# EAGLE board kai (EAGLE 9.6.2)
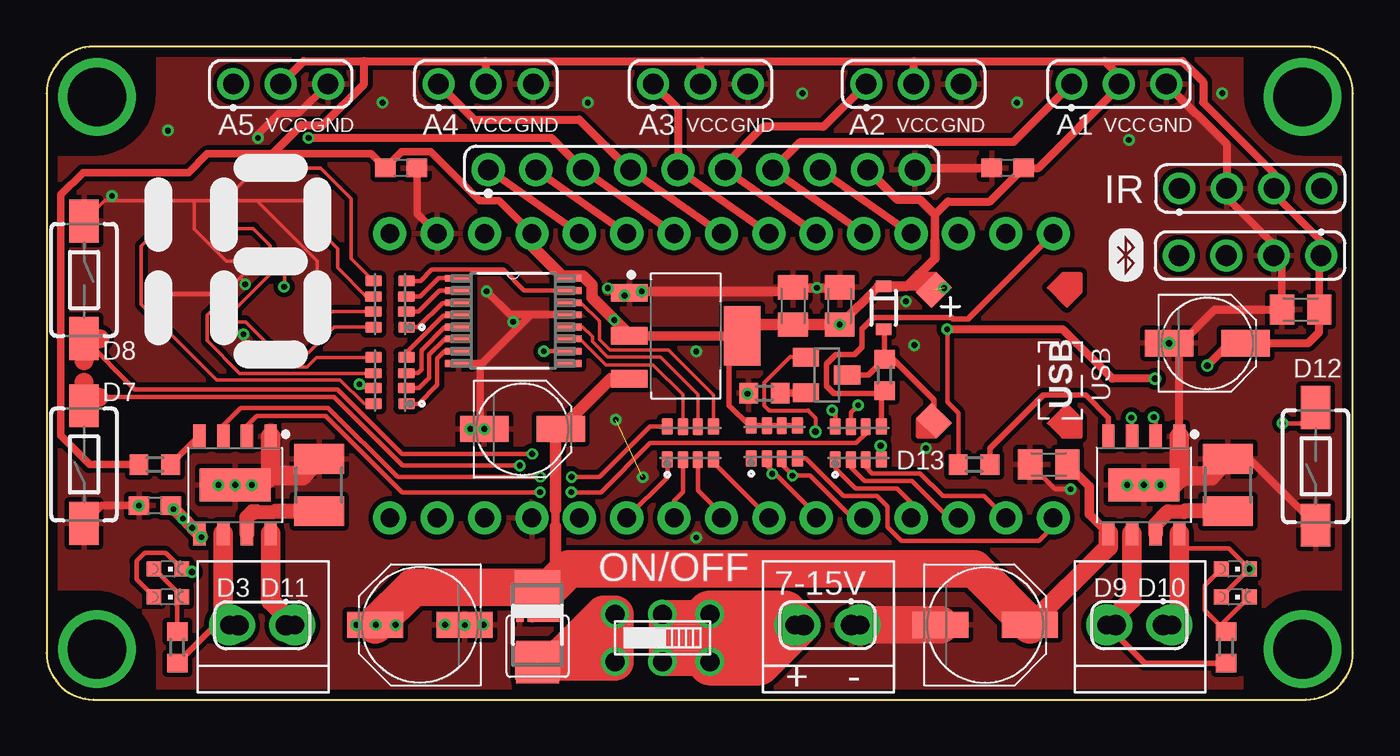
[diagram p0: board, top side]
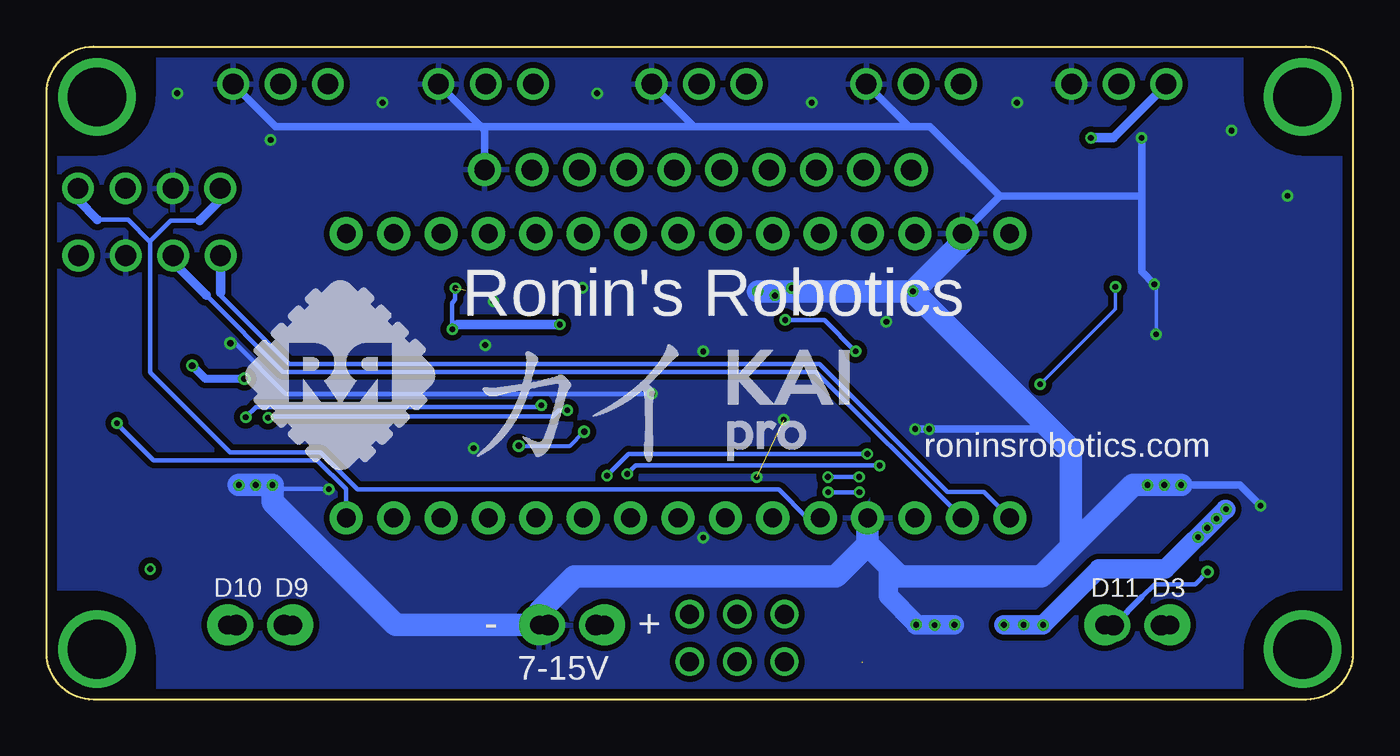
[diagram p1: board, bottom side, seen from below]

Size 70 x 35 mm. Coordinates in mm from the lower left corner, seen from the top.
Outline: 0,2.5 arc90 2.5,0 67.5,0 arc90 70,2.5 70,32.5 arc90 67.5,35 2.5,35 arc90 0,32.5 0,2.5
Copper layers (1*16): Top 0.035mm / dielectric 1.6mm / Bottom 0.035mm
Design rules "Elecrow_2-layer_PCB_eagle_rule *": minimum track width 6mil, minimum drill 12mil, track to track 6mil, track to pad 6mil, pad to pad 6mil, via to via 8mil, smd to smd 0mil, copper to edge 20mil, drill to drill 10mil, minimum pad ring 6mil, minimum via ring 6mil, stop-mask expansion 0mil, vias tented up to drill 100mil, thermal gap 10mil

## Footprints (pad centres in the part's own frame; a part is rotated, then mirrored left to right if it is on the bottom)
C0805K = smd 1.3 x 1.6: 1 -1,0; 2 1,0
C0603 = smd 1.1 x 1: 1 -0.85,0; 2 0.85,0
PANASONIC_C = smd 2.6 x 1.4: + 2.05,0; - -2.05,0
SOD-323 = smd 0.63 x 0.83: A 1.15,0; C -1.15,0
1X10 = drill 1.092 pad 1.778: 1 -11.43,0; 2 -8.89,0; 3 -6.35,0; 4 -3.81,0; 5 -1.27,0; 6 1.27,0; 7 3.81,0; 8 6.35,0; 9 8.89,0; 10 11.43,0
DFN-8_3X3 = smd 2.29 x 2.29: D 0,0.8 | smd 0.4 x 0.7: G 0.96,-1.7 | smd 1.7 x 0.7: S -0.3,-1.7
RESCAXS80P320X160X70-8N = smd 0.61 x 0.9: 1 -1.24,-0.885; 4 1.24,-0.885; 5 1.24,0.885; 8 -1.24,0.885 | smd 0.53 x 0.9: 2 -0.4,-0.885; 3 0.4,-0.885; 6 0.4,0.885; 7 -0.4,0.885
SOT23-BEC = smd 1 x 1.4: B -0.95,-1.1; C 0,1.1; E 0.95,-1.1
SOP65P640X120-16N = smd 1.473 x 0.356: 1 -2.921,2.286; 2 -2.921,1.626; 3 -2.921,0.965; 4 -2.921,0.33; 5 -2.921,-0.33; 6 -2.921,-0.965; 7 -2.921,-1.626; 8 -2.921,-2.286; 9 2.921,-2.286; 10 2.921,-1.626; 11 2.921,-0.965; 12 2.921,-0.33; 13 2.921,0.33; 14 2.921,0.965; 15 2.921,1.626; 16 2.921,2.286
ARDUINO_NANO = drill 1 pad 1.778: 3V3 7.874,2.794; A0 7.874,7.874; A1 7.874,10.414; A2 7.874,12.954; A3 7.874,15.494; A4 7.874,18.034; A5 7.874,20.574; A6 7.874,23.114; A7 7.874,25.654; D2 -7.366,25.654; D3 -7.366,23.114; D4 -7.366,20.574; D5 -7.366,18.034; D6 -7.366,15.494; D7 -7.366,12.954; D8 -7.366,10.414; D9 -7.366,7.874; D10 -7.366,5.334; D11 -7.366,2.794; D12 -7.366,0.254; D13 7.874,0.254; GND -7.366,28.194; GND1 7.874,33.274; REF 7.874,5.334; RST -7.366,30.734; RST1 7.874,30.734; RX0 -7.366,33.274; TX1 -7.366,35.814; VA 7.874,35.814; VCCA 7.874,28.194
SOT230P700X170-4 = smd 1.965 x 0.932: 1 -3.023,2.3; 2 -3.023,0; 3 -3.023,-2.3 | smd 1.965 x 3.189: 4 3.023,0
SOIC127P600X170-8 = smd 1.27 x 0.66: 1 -2.607,1.905; 2 -2.607,0.635; 3 -2.607,-0.635; 4 -2.607,-1.905; 5 2.607,-1.905; 6 2.607,-0.635; 7 2.607,0.635; 8 2.607,1.905 | smd 1.778 x 3.81: P$1 0,0
C&K_HEX_DIP_SLIDE = drill 1.016: 1 -2.54,-1.27; 2 0,-1.27; 3 2.54,-1.27; 4 -2.54,1.27; 5 0,1.27; 6 2.54,1.27
DO-214AC = smd 1.8 x 2.4: A 2.025,0; C -2.025,0
PANASONIC_D = smd 3 x 1.4: + 2.4,0; - -2.4,0
R0603 = smd 1 x 1.1: 1 -0.85,0; 2 0.85,0
SMD_7.5_BUZZER = smd 1.55 x 1.2 rotated 45: + -3.5,3.5 | smd 1.55 x 1.2 rotated 135: - -3.5,-3.5
1X2 = drill 1.092 pad 1.778: P$1 0,0; P$2 2.54,0
R1210 = smd 1.6 x 2.7: 1 -1.4,0; 2 1.4,0
0603_LED_GREEN = smd 0.8 x 0.8: A 0,-0.75; C 0,0.75
HDRVR4W64P254_1X4_1016X240X800B = drill 1.105 pad 1.705: 1 0,0; 2 2.54,0; 3 5.08,0; 4 7.62,0
1X2-3.5MM = drill 1 pad 2.184: 1 1.8,0; 2 -1.7,0
TACTILE_SWITCH_SMD_6.0X3.5MM = smd 2.3 x 1.6: 1 -3.15,0; 2 3.15,0
HDRVR3W64P254_1X3_762X240X800B = drill 1.105 pad 1.705: 1 0,0; 2 2.54,0; 3 5.08,0

## Placement (x,y rotation side)
C1  CAPACITOR_CER6  [C0805K]  40,21.1 90 top
C2  CAPACITOR_CER6  [C0805K]  42.5,21.1 90 top
C3  CAPACITOR_CER6  [C0805K]  67.2,20.9 180 top
C4  CAPACITOR_CER6  [C0805K]  53.7,12.6 180 top
C5  CAPACITOR_CER4  [C0603]  51.5,28.5 180 top
C6  CAPACITOR_CER4  [C0603]  19,28.5 0 top
C8  CAPACITOR_POLC  [PANASONIC_C]  62.2,19.1 0 top
D1  [SOD-323]  44.85,21 270 top
JP1  [1X10]  35.1,28.4 0 top
Q1  AON7401  [DFN-8_3X3]  26.31,2.81 180 top
R1  YC164-JR-071K5  [RESCAXS80P320X160X70-8N]  18.4,21.2 90 top
R2  YC164-JR-071K5  [RESCAXS80P320X160X70-8N]  18.4,17.1 90 top
R4  YC164-JR-071K5  [RESCAXS80P320X160X70-8N]  43.5,13.75 0 top
R5  YC164-JR-071K5  [RESCAXS80P320X160X70-8N]  34.5,13.75 0 top
R6  YC164-JR-071K5  [RESCAXS80P320X160X70-8N]  39,13.8 0 top
T1  [SOT23-BEC]  41.8,17.4 270 top
U2  SN74HC595MPWREP  [SOP65P640X120-16N]  25,20.3 0 top
U$1  ARDUINO_NANO  [ARDUINO_NANO]  54.2,17.1 90 top
U$2  1117  [SOT230P700X170-4]  34.25,19.5 0 top
U$3  DRV8872.V2  [SOIC127P600X170-8]  10.1,11.5 270 top
U$4  DRV8872.V2  [SOIC127P600X170-8]  58.8,11.5 270 top
U$5  C&K_SWITCH  [C&K_HEX_DIP_SLIDE]  33,3.3 180 top
U$6  DIODEAC2  [DO-214AC]  26.3,4 270 top
U$7  CAPACITOR_POLD  [PANASONIC_D]  50.3,4 0 top
U$8  CAPACITOR_POLD  [PANASONIC_D]  20,4 180 top
U$9  CAPACITOR_POLC  [PANASONIC_C]  25.5,14.5 0 top
U$10  RESISTOR0603  [R0603]  49.7,12.6 0 top
U$11  RESISTOR0603  [R0603]  5.8,12.6 0 top
U$12  7.5X7.5_BUZZER  [SMD_7.5_BUZZER]  51.05,18.45 0 top
U$13  1X2  [1X2]  59.83,3.99 180 top
U$14  RESISTOR0603  [R0603]  44.9,17.4 270 top
U$15  1X2  [1X2]  12.82,3.98 180 top
U$16  RESISTOR1210  [R1210]  14.6,11.5 90 top
U$17  RESISTOR1210  [R1210]  63.3,11.5 90 top
U$18  1X2  [1X2]  43.12,3.99 180 top
U$19  RESISTOR0603  [R0603]  7,2.8 90 top
U$20  RESISTOR0603  [R0603]  63.2,2.8 90 top
U$21  LED0603_G  [0603_LED_GREEN]  6.5,7 270 top
U$22  LED0603_G  [0603_LED_GREEN]  6.5,5.5 270 top
U$23  LED0603_G  [0603_LED_GREEN]  63.7,5.5 270 top
U$24  LED0603_G  [0603_LED_GREEN]  63.7,7 270 top
U$25  RESISTOR0603  [R0603]  38.47,16.42 180 top
U$34  FML_1X4  [HDRVR4W64P254_1X4_1016X240X800B]  68.3,23.8 180 top
U$37  CAPACITOR_CER4  [C0603]  5.8,10.4 180 top
U$43  FML_1X4  [HDRVR4W64P254_1X4_1016X240X800B]  60.7,27.4 0 top
U$45  1X2-3.5MM  [1X2-3.5MM]  58.5,4 0 top
U$46  1X2-3.5MM  [1X2-3.5MM]  11.5,4 0 top
U$47  1X2-3.5MM  [1X2-3.5MM]  41.8,4 0 top
U$48  SWITCH  [TACTILE_SWITCH_SMD_6.0X3.5MM]  68,12.5 90 top
U$49  SWITCH  [TACTILE_SWITCH_SMD_6.0X3.5MM]  2,22.5 270 top
U$50  SWITCH  [TACTILE_SWITCH_SMD_6.0X3.5MM]  2,12.6 90 top
U$57  FML_1X3  [HDRVR3W64P254_1X3_762X240X800B]  54.92,33 0 top
U$58  FML_1X3  [HDRVR3W64P254_1X3_762X240X800B]  43.92,33 0 top
U$59  FML_1X3  [HDRVR3W64P254_1X3_762X240X800B]  32.5,33 0 top
U$60  FML_1X3  [HDRVR3W64P254_1X3_762X240X800B]  21,33 0 top
U$61  FML_1X3  [HDRVR3W64P254_1X3_762X240X800B]  10,33 0 top
U$64  LED0603_G  [0603_LED_GREEN]  12,28.5 90 top
U$65  LED0603_G  [0603_LED_GREEN]  14.5,26 0 top
U$66  LED0603_G  [0603_LED_GREEN]  14.5,21 0 top
U$67  LED0603_G  [0603_LED_GREEN]  12,18.5 90 top
U$68  LED0603_G  [0603_LED_GREEN]  9.5,21 0 top
U$69  LED0603_G  [0603_LED_GREEN]  9.5,26 0 top
U$70  LED0603_G  [0603_LED_GREEN]  12,23.5 90 top
U$71  LED0603_G  [0603_LED_GREEN]  6,26 0 top
U$72  LED0603_G  [0603_LED_GREEN]  6,21 0 top

## Library data of the parts
C1-C6 C8 U$6-U$11 U$14 U$16 U$17 U$19-U$25 U$37 U$64-U$72 = pasif_com1
D1 = BeagleBone_Blue_R3; PROD_ID: DIO-09646
JP1 U$13 U$15 U$18 U$34 U$43 U$45-U$47 U$57-U$61 = header_3d
Q1 = AON7401
R1 R2 R4-R6 = YC164-JR-071K5; AVAILABILITY: Unavailable; DESCRIPTION: Resistor network: Y; 1.5kΩ; SMD; 1206; No.of resistors: 4; 63mW; ±5%; MF: Yageo; MP: YC164-JR-071K5; PACKAGE: 1206 Yageo; PRICE: None
T1 = transistor
U2 = 74HC595; DESCRIPTION: Enhanced Product 8-Bit Shift Registers With 3-State Output Registers 16-TSSOP -55 to 125; DIGI-KEY_PART_NUMBER: 296-27413-1-ND; DIGI-KEY_PURCHASE_URL: https://www.digikey.com.tr/product-detail/en/texas-instruments/SN74HC595MPWREP/296-27413-1-ND/2288061?utm_source=snapeda&utm_medium=aggregator&utm_campaign=symbol; MF: Texas Instruments; MP: SN74HC595MPWREP; PACKAGE: TSSOP-16 Texas Instruments
U$1 = arduino_nano
U$2 = v_reg
U$3 U$4 = ic
U$5 = c&k switch 6 dip
U$12 = buzzer_smd_no_drill
U$48-U$50 = switchs

## Nets
A0: JP1.8 U$1.A0
A1: JP1.7 U$1.A1 U$57.1
A2: JP1.6 U$1.A2 U$58.1
A3: JP1.5 U$1.A3 U$59.1
A4: JP1.4 U$1.A4 U$60.1
A5: JP1.3 U$1.A5 U$61.1
A6: JP1.2 U$1.A6
A7: JP1.1 U$1.A7
D2: U$1.D2 U$43.1 U$43.4
D3: R5.1 U$1.D3
D4: R5.2 U$1.D4
D5: R5.3 U$1.D5
D6: R5.4 U$1.D6
D7: R6.2 U$1.D7 U$50.2
D8: R6.3 U$1.D8 U$49.2
D9: R4.1 U$1.D9
D10: R4.2 U$1.D10
D11: R4.3 U$1.D11
D12: R6.4 U$1.D12 U$48.2
D13: R4.5 U$1.D13 U$14.2
GND: C1.2 C2.2 C3.2 C4.2 C5.2 C6.2 C8.- JP1.10 Q1.G U2.8 U2.13 U$1.GND U$1.GND1 U$2.1 U$3.1 U$3.P$1 U$4.1 U$4.P$1 U$7.- U$8.- U$9.- U$16.2 U$17.2 U$18.P$1 U$25.2 U$34.2 U$37.2 U$43.2 U$47.1 U$48.1 U$49.1 U$50.1 U$57.3 U$58.3 U$59.3 U$60.3 U$61.3 U$64.C U$65.C U$66.C U$67.C U$68.C U$69.C U$70.C U$71.C U$72.C
N$1: U$5.1 U$5.2 U$5.4 U$5.5 U$18.P$2 U$47.2
N$2: Q1.D U$5.3 U$5.6 U$6.A
N$3: R1.5 U$64.A
N$4: U$20.2 U$23.C U$24.A
N$5: D1.A T1.C U$12.- U$14.1
N$7: U$3.4 U$11.2
N$9: U$3.7 U$16.1
N$10: U$3.6 U$15.P$2 U$19.1 U$46.2
N$11: U$4.8 U$13.P$1 U$23.A U$24.C U$45.1
N$14: U$4.4 U$10.2
N$15: R1.6 U$65.A
N$16: U$4.7 U$17.1
N$17: U$4.6 U$13.P$2 U$20.1 U$45.2
N$18: U$1.RST
N$19: U$19.2 U$21.A U$22.C
N$20: U$3.8 U$15.P$1 U$21.C U$22.A U$46.1
N$21: T1.E U$25.1
N$29: R1.7 U$66.A
N$30: R1.8 U$67.A
N$31: R2.5 U$68.A
N$32: U$1.VA
N$33: U$1.RST1
N$34: R2.6 U$69.A
N$35: R2.7 U$70.A
N$36: R1.4 U2.15
N$37: R1.3 U2.1
N$38: R1.2 U2.2
N$39: R1.1 U2.3
N$40: R2.4 U2.4
N$41: R2.3 U2.5
N$43: U$1.REF
N$44: U$1.3V3
N$45: R2.2 U2.6
N$46: R2.1 U2.7
N$49: U2.9
N$52: R2.8 U$71.A U$72.A
RD3: R5.8 U$3.3
RD4: R5.7 U2.11
RD5: R5.6 U2.12
RD6: R5.5 U2.14
RD9: R4.8 U$4.3
RD10: R4.7 U$4.2
RD11: R4.6 U$3.2
RD13: R4.4 T1.B
RX: U$1.RX0 U$34.3
TX: U$1.TX1 U$34.4
VCC: C1.1 C2.1 C3.1 C5.1 C6.1 C8.+ D1.C JP1.9 R6.5 R6.6 R6.7 U2.10 U2.16 U$1.VCCA U$2.2 U$2.4 U$10.1 U$11.1 U$12.+ U$34.1 U$43.3 U$57.2 U$58.2 U$59.2 U$60.2 U$61.2
VM: C4.1 Q1.S U$2.3 U$3.5 U$4.5 U$6.C U$7.+ U$8.+ U$9.+ U$37.1

## Tracks (layer width: path | path; a pad name or v marks a point on that pad's centre or on a via)
A0
  Top 0.4: JP1.8 U$1.A0
A1
  Top 0.4: JP1.7 U$1.A1
  Top 0.43: JP1.7 40.41,29.9 51.83,29.9 U$57.1
A2
  Top 0.4: JP1.6 U$1.A2
  Top 0.43: U$58.1 41.62,30.7 38.4,30.7 36.37,28.67 JP1.6
A3
  Top 0.4: JP1.5 U$1.A3
  Top 0.43: U$59.1 33.83,31.67 JP1.5
A4
  Top 0.4: JP1.4 31.32,28.38 U$1.A4
  Top 0.43: U$60.1 22.91,31.09 28.53,31.09 31.25,28.38 31.32,28.38
A5  (via drill 0.3)
  Top 0.4: JP1.3 U$1.A5
  Top 0.43: v14.04,30.11 27.04,30.11 JP1.3
  Bottom 0.508: U$61.1 10,32.95 12.84,30.11 v14.04,30.11
A6
  Top 0.4: JP1.2 U$1.A6
A7
  Top 0.4: U$1.A7 JP1.1
D2
  Bottom 0.152: 64.47,24.55 64.5,24.5 64.46,24.5
  Bottom 0.254: U$1.D2 29.24,9.73 30.76,11.25 53.34,11.25 55.32,13.24 60.16,13.24 64.46,17.54 64.46,24.5 64.46,24.55 | 67.28,25.72 65.63,25.72 64.47,24.55 63.35,25.67 61.8,25.67
  Bottom 0.508: U$43.1 60.7,26.77 61.8,25.67 | U$43.4 68.32,26.76 67.28,25.72
D3
  Top 0.25: U$1.D3 33.26,11.91 R5.1
D4
  Top 0.25: R5.2 34.1,11.12 33.63,10.64 U$1.D4
D5
  Top 0.25: R5.3 34.9,11.22 36.17,9.95 U$1.D5
D6
  Top 0.25: R5.4 35.74,12.7 U$1.D6
D7  (via drill 0.3)
  Top 0.25: R6.2 38.6,12.55 38.97,12.18 41.25,9.9 U$1.D7
  Top 0.254: 38.97,12.18 v38.88,12.09 | v25.35,12.54 19.08,12.54 15.42,16.21 2.8,16.21 | 2.33,15.75 U$50.2
  Top 1.016: 2,17 U$50.2 2.46,16.21 2.8,16.21
  Bottom 0.254: v25.35,12.54 38.44,12.54 v38.88,12.1 v38.88,12.09
D8  (via drill 0.3)
  Top 0.25: R6.3 39.4,12.61 39.95,12.06 40.01,12.01 40.91,12.01 43.18,9.73 U$1.D8
  Top 0.254: 39.95,12.06 39.97,12.05 v39.97,12.01 | v26.02,13.16 19.04,13.16 15.58,16.62 4.73,16.62 U$49.2
  Top 1.016: 2,18.17 U$49.2 2.85,19.35
  Bottom 0.254: v39.97,12.01 38.81,13.16 v26.02,13.16
D9
  Top 0.25: R4.1 42.26,12.4 43.34,11.32 45.56,11.32 46.33,10.56 U$1.D9
  Top 0.254: R4.1 42.29,12.83
D10
  Top 0.25: R4.2 43.1,12.44 43.82,11.72 46.38,11.72 48.37,9.73 U$1.D10
D11
  Top 0.25: R4.3 43.9,12.46 44.23,12.13 46.81,12.13 48.02,10.92 50.22,10.92 U$1.D11
D12  (via drill 0.3)
  Top 0.25: U$1.D12 53.95,9.28 53.17,8.5 45.82,8.5 45.05,9.26 45.05,10.34 44.49,10.91 42.71,10.91 40.7,12.91 R6.4
  Top 0.254: U$48.2 67.74,14.81 v66.23,14.81
  Bottom 0.254: U$1.D12 53.95,11.28 55.49,12.83 64.25,12.83 v66.23,14.81
D13
  Top 0.25: 44.9,14.79 R4.5
  Top 0.3: 44.9,16.62 U$14.2 44.69,16.55 | U$1.D13 49.44,20.47
  Top 0.305: 49.44,20.47 49.37,20.4 48.57,20.4 48.5,20.47 44.31,20.47 43.7,19.86 43.7,18.9 43.3,18.5 42.3,18.5 41.8,18 41.8,16.8 42.2,16.4 44.75,16.4 | 44.75,16.4 U$14.2 | R4.5 44.74,16.39 44.75,16.4
GND  (via drill 0.3, 0.35)  (1 unrouted)
  Top 0.152: 12.01,12.5 12,12.5 12.01,12.01 | U$8.- 22.5,4 U$8.- | v22.7,14.5 23,14.5 U$9.- | U$2.1 31.2,21.77 v30.97,21.66 | 59.5,11.41 59.5,11.5 U$4.P$1
  Top 0.2: U$49.1 3.1,26.75 U$71.C 7.91,26.75 | 7.91,26.75 U$69.C | U$69.C U$64.C | U$68.C 10.37,22.61 | 10.37,22.61 U$70.C 9.62,23.5 7.91,25.21 7.91,26.75 | U$66.C 14.5,23.52 11.27,26.75 | 11.27,26.75 U$69.C | U$65.C 11.27,26.75 | U$67.C 10.54,19.21 v10.54,19.58 | v10.64,22.26 10.64,22.34 10.37,22.61
  Top 0.25: U$25.2 37.59,16.39 v37.56,16.39
  Top 0.254: C4.2 54.02,11.28 v54.88,11.28 | U$72.C U$68.C
  Top 0.4: U$17.2 64.45,12.9 U$48.1 | C3.2 66.2,23.36 U$34.2 65.76,24.39 63.24,26.91 U$43.2 | U$1.GND1 19.85,26.05 C6.2 | U$9.- 23.23,14.72 23.23,17.83 23.04,18.01 | U2.13 25.96,20.63 | 23.04,18.01 23.34,18.01 25.96,20.63 | 23.04,18.01 U2.8 | 25.96,20.63 24.82,20.63 v23.57,21.88 | U$61.3 13.5,31.42 12.46,31.42 11.23,30.2 v11.32,30.11 | U$50.1 2.95,10.4 U$37.2
  Top 0.43: U$57.3 63.24,29.77 U$43.2
  Top 0.44: U$4.1 60.7,19 62.6,20.9 C3.2
  Top 0.45: C5.2 46.63,28.5 JP1.10
  Top 0.5: U$2.1 31.31,21.88 v31.89,21.88 39.78,21.88 C1.2 40.03,22.07 v41.28,22.07 42.47,22.07 C2.2
  Top 1.05: U$4.1 60.7,12 62.4,12 U$17.2 | 60.7,11.82 60.3,11.41 59.5,11.41 58.27,11.41 | U$16.2 13.71,12.01 12.01,12.01 12.01,12.5 U$3.1 | U$3.P$1 10.4,11.8 11.8,11.8 12.01,12.01
  Top 2: U$47.1 U$7.-
  Bottom 0.152: v30.08,22.05 30.31,22.05 30.31,21.88 | U$8.- 22.5,4 22.5,4.01
  Bottom 0.2: v10.54,19.58 10.54,22.16 v10.64,22.26
  Bottom 0.25: v37.56,16.39 57.19,16.39 59.9,19.1 C8.-
  Bottom 0.254: v54.88,11.28 57.68,11.28 v57.9,11.5 | v41.28,22.07 41.31,22.05
  Bottom 0.4: 16.2,14.51 U$9.- | v11.32,30.11 11.32,26.98 | 11.32,26.98 11.32,22.93 v10.64,22.26 | U$1.GND1 18.92,26.98 | 18.92,26.98 11.32,26.98 | 18.92,26.98 22.66,30.72 23.8,30.72 | U$60.3 23.8,30.72 | 23.8,30.72 35.3,30.72 | 35.3,30.72 U$59.3 | 35.3,30.72 46.72,30.72 | U$58.3 46.72,30.72 | JP1.10 46.53,30.52 46.72,30.72 | 46.72,30.72 57.72,30.72 U$57.3 | U$37.2 6.05,11.5 v9.2,11.5
  Bottom 1.05: v21.35,4.01 22.5,4.01 v23.41,4.01 23.41,4.06 24.9,5.54 24.9,7.2
  Bottom 1.2: v59.7,11.5 U$4.P$1 v57.9,11.5 57.9,10.6 51.3,4 U$47.1 43.6,4.7 41.7,6.6 27.7,6.6 26.01,8.29 U$1.GND 26.01,8.31 24.9,7.2 24.3,6.6 16.7,6.6 15.11,8.19 | v9.2,11.5 U$3.P$1 v11,11.5 11.8,11.5 15.11,8.19 | 15.11,8.19 15.11,13.41 16.2,14.51 v23.57,21.88 | v23.57,21.88 30.31,21.88 | 30.5,21.88 v31.89,21.88 | U$1.GND1 20.93,24.53 v23.57,21.88
  other vias: 10.1,11.5 58.8,11.5 4.95,10.4 23.45,14.5 22.4,4 3.5,27 18,32 29,32 40.5,32.5 52,32 58,30 63,32.5 6.5,30.5 30.5,15 46.5,19 46.05,21.35 47.12,13.47 25,20.25 60.15,19.1 34.82,8.68 34.82,18.66 31.94,11.92
  pour Top (isolate 0.254): 2.5,29 arc90 6,32.5 6,35 64,35 64,32.5 arc90 67.5,29 70,29 70,6 67.75,6 arc90 64,2.25 64,0 6,0 6,2.5 arc90 2.5,6 0,6 0,29
  pour Bottom (isolate 0.305): 0,29 2.5,29 arc90 6,32.5 6,35 64,35 64,32.5 arc90 67.5,29 70,29 70,6 67.75,6 arc90 64,2.25 64,0 6,0 6,2.5 arc90 2.5,6 0,6
N$1
  Top 0.203: U$47.2 U$18.P$2
  Top 1.5: U$5.2 U$5.1 U$5.4 U$5.2 | U$5.2 U$5.5 35.59,2.03
  Top 2.54: U$5.1 39.53,4.57 U$47.2 38.13,2.03 35.59,2.03
N$2  (1 unrouted)
  Top 2: U$5.3 U$5.6 26.36,2.03 U$6.A 27.24,1.98 29.84,4.57 U$5.3 | U$5.3 28.01,2.12 26.19,2.12
N$3
  Top 0.2: R1.5 16.33,23.63 16.33,26.86 14.69,28.5 U$64.A
N$4
  Top 0.254: U$24.A 62.06,6.11 62.06,4.79 63.03,3.82 63.03,4.08 U$23.C
  Top 0.3: U$20.2 63.03,3.82 62.95,3.9
N$5
  Top 0.305: U$12.- 47.55,16.05 45.35,18.25 U$14.1 | T1.C 44.05,17.4 U$14.1 | U$14.1 44.9,19.8 D1.A
N$6  (via drill 3.15)
  other vias: 2.7,32.3
N$7
  Top 0.3: U$11.2 8.16,14.11 U$3.4
N$8  (via drill 3.15)
  other vias: 67.3,32.3
N$9
  Top 0.75: 11.23,10.06 11.25,10.07 12.21,10.07 12.24,10.1 12.28,10.1
  Top 0.8: 12.28,10.1 U$16.1 | U$3.7 10.73,9.77 11.02,10.06 11.23,10.06
N$10
  Top 0.3: U$19.1 9.05,4 U$46.2
  Top 1.05: U$3.6 9.46,4.33 U$46.2 9.82,3.98 U$15.P$2
N$11  (via drill 0.3)
  Top 0.254: 60.7,8.11 63.34,8.11 U$24.C U$23.A
  Top 0.3: 60.87,7 60.7,7.17
  Top 1.05: U$4.8 60.7,8.11 60.7,7.17 60.7,4.41 U$45.1 U$13.P$1
  other vias: 64.45,7
N$12  (via drill 3.15)
  other vias: 67.3,2.7
N$13  (via drill 3.15)
  other vias: 2.7,2.7
N$14
  Top 0.3: U$10.2 50.55,13.46 53.41,16.32 55.68,16.32 56.9,15.1 U$4.4
N$15
  Top 0.2: R1.6 17.12,21.6 15.58,23.14 15.58,24.17 U$65.A
N$16
  Top 0.75: 60.1,10.06 60.12,10.08 60.92,10.08 60.94,10.1 60.98,10.1
  Top 0.8: U$4.7 59.44,9.4 60.1,10.06 | U$17.1 60.98,10.1 60.96,10.08
N$17
  Top 0.3: U$20.1 58.85,1.95 U$45.2
  Top 1.05: U$4.6 58.16,5.37 U$45.2 57.27,4 U$13.P$2
N$19
  Top 0.254: U$21.A U$22.C 7,5.25 U$19.2
N$20  (via drill 0.35)
  Top 0.254: v7.79,6.84 7.41,6.84 U$21.C 6.39,7.86 5.26,7.86 4.82,7.42 4.82,6.43 U$22.A
  Top 1.05: U$3.8 12.01,5.29 U$46.1 12.84,4 U$15.P$1
  Bottom 0.254: 11.3,5.5 10.62,6.18 8.45,6.18 v7.79,6.84
  Bottom 0.3: U$15.P$1 11.3,5.5
N$21
  Top 0.4: T1.E 40.67,16.42 U$25.1
N$29
  Top 0.2: R1.7 15.05,20.8 U$66.A
N$30
  Top 0.2: R1.8 15.4,19.96 13.95,18.5 U$67.A
N$31
  Top 0.2: R2.5 14.47,18.34 13.97,17.84 12.18,17.84 11.9,18.12 11.9,19 10.66,20.25 U$68.A
N$34
  Top 0.2: U$69.A 11.07,25.25 11.98,24.34 11.98,22.81 10.15,20.98 8.97,20.98 8.61,20.61 8.61,19.23 10.36,17.48 17.5,17.48 R2.6
N$35  (via drill 0.3)
  Top 0.2: U$70.A 12.75,22.15 v12.72,22.12 | v16.75,16.91 16.93,16.72 17.49,16.72 R2.7
  Bottom 0.2: v12.72,22.12 12.72,20.93 v16.75,16.91
N$36
  Top 0.254: U2.15 25.6,21.93 24.48,23.04 20.64,23.04 20.04,22.44 R1.4
N$37
  Top 0.254: U2.1 21.01,22.59 20.03,21.6 R1.3
N$38
  Top 0.254: U2.2 21.07,21.93 19.95,20.8 R1.2
N$39
  Top 0.254: U2.3 21.22,21.27 19.91,19.96 R1.1
N$40
  Top 0.254: U2.4 22.03,20.58 21.27,20.58 19.29,18.59 R2.4
N$41
  Top 0.254: U2.5 21.34,19.97 20.09,18.72 20.09,17.69 19.9,17.5 R2.3
N$45
  Top 0.254: U2.6 21.34,19.34 20.5,18.49 20.5,17.24 19.96,16.7 R2.2
N$46
  Top 0.254: U2.7 21.34,18.67 20.94,18.27 20.94,16.85 19.93,15.84 19.3,15.84 R2.1
N$52
  Top 0.2: U$71.A 5.07,24.32 5.07,21.18 U$72.A 9.12,17.13 15.74,17.13 17.01,15.86 R2.8
RD3  (via drill 0.3)
  Top 0.25: R5.8 32.33,14.63 29.62,11.93 v28.13,11.93 | v26.45,11.93 26.42,11.93 26.41,11.93 18.8,11.93 15.09,15.64 10.41,15.64 9.46,14.7 U$3.3
  Bottom 0.25: v28.13,11.93 v26.45,11.93
RD4
  Top 0.2: R5.7 34.1,16.34 32.51,17.94 29.99,17.94 28.59,19.34 U2.11
RD5
  Top 0.2: R5.6 34.89,16.36 32.9,18.36 30.07,18.36 29.25,19.18 29.25,19.45 28.73,19.97 U2.12
RD6
  Top 0.2: R5.5 35.74,16.32 33.33,18.73 30.19,18.73 29.63,19.29 29.63,20.28 28.64,21.27 U2.14
RD9  (via drill 0.3)
  Top 0.254: R4.8 42.26,15.34 v42.09,15.51 | v58.13,15.1 58.16,15.06 U$4.3
  Bottom 0.254: v42.09,15.51 42.56,15.51 42.9,15.17 58.06,15.17 v58.13,15.1
RD10  (via drill 0.3)
  Top 0.254: R4.7 43.1,15.39 v43.49,15.78 | v59.33,15.14 59.44,15.04 U$4.2
  Bottom 0.254: v43.49,15.78 43.57,15.7 58.78,15.7 v59.33,15.14
RD11  (via drill 0.3)
  Top 0.25: R4.6 43.9,14.27 43.38,13.75 32.34,13.75 29.7,11.12 v28.12,11.12 | v26.44,11.11 19.04,11.11 14.94,15.21 11.26,15.21 10.73,14.69 U$3.2
  Bottom 0.25: v28.12,11.12 v28.12,11.11 v26.44,11.11
RD13  (via drill 0.35)
  Top 0.203: T1.B 39.83,18.35 38.45,16.97 38.45,15.76 38.71,15.5 40.8,15.5 41.2,15.1 v41.2,14.36
  Top 0.305: R4.4 44.74,13.56 v44.7,13.6
  Bottom 0.203: v44.7,13.6 41.96,13.6 v41.2,14.36
RX
  Bottom 0.254: U$1.RX0 28.76,17.57 57.35,17.57 61.45,21.68
  Bottom 0.508: U$34.3 63.22,23.44 61.45,21.68
TX
  Bottom 0.254: U$1.TX1 19.77,11.12 21.74,11.12 28.59,17.98 57,17.98 60.68,21.65 60.68,21.83
  Bottom 0.508: U$34.4 60.68,21.83
VCC  (via drill 0.3, 0.35)  (1 unrouted)
  Top 0.25: R6.7 R6.6 R6.5
  Top 0.254: U$10.1 48.85,15.35 48.27,15.94 v48.27,19.84 | U2.10 26.66,18.67 v26.64,18.66
  Top 0.3: D1.C 44.57,22.15 44.55,22.15 44.57,22.13
  Top 0.305: 37.1,19.29 37.1,18.8 37.25,18.65 | 37.1,19.29 37.1,19.5 | R6.5 R6.7 37.66,14.69 36.58,15.77 36.58,18.77 37.1,19.29
  Top 0.4: C3.1 68.2,23.7 U$34.1 68.3,24.59 65.78,27.11 U$43.3 65.78,28.2 61.98,32.01 | U$11.1 2.3,12.6 0.76,14.14 0.76,27.06 1.95,28.25 7.6,28.25 8.61,29.25 12.1,29.25 17.4,29.25 C6.1 19.02,29.37 20.58,29.37 23.21,26.73 24.25,26.73 U$1.VCCA | U2.16 27.92,22.66 27.96,22.7
  Top 0.43: U$61.2 13.77,34.23 17,34.23 | 56.7,34.23 57.47,33.46 U$57.2 57.47,32.81 53.15,28.5 C5.1 50.55,26.7 48.31,26.7 47.6,25.99 | 17,34.23 23.5,34.23 | 23.5,34.23 35.1,34.23 | 35.1,34.23 46.5,34.23 | 46.5,34.23 56.7,34.23 | U$58.2 46.47,34.19 46.5,34.23 | U$59.2 35.04,34.17 35.1,34.23 | U$60.2 23.54,34.19 23.5,34.23 | 56.7,34.23 60.87,34.23 61.98,33.12 61.98,32.01 | 12.1,29.25 13.65,30.8 14.8,30.8 17,33 17,34.23
  Top 0.44: C3.1 68.2,19.7 67.6,19.1 C8.+ 63.4,19.1 v62.2,17.9 | v59.4,17.2 57.1,17.2 54.46,19.84 v48.27,19.84
  Top 0.45: 47.6,24.61 47.6,25.99 46.8,26.79 45.6,26.79 JP1.9
  Top 0.5: U$2.2 37.1,19.5 U$2.4 | C2.1 42.52,20.1 44.57,22.15 | v48.1,22.06 47.47,22.06 47.36,22.17 44.57,22.17 44.55,22.15 | D1.C 46.08,22.15 46.71,22.78 46.73,22.78 47.6,23.64 47.6,24.61
  Top 0.61: C1.1 37.87,20.1 U$2.4 | C2.1 C1.1 | C1.1 40.35,19.75 | U$2.2 31.23,19.55 v30.43,20.35 29.22,21.55 29.22,22.21 28.73,22.7 27.96,22.7 27.62,22.7 26.01,24.31 U$1.VCCA
  Bottom 0.254: v48.27,19.84 48.27,21.26 48.1,21.43 v48.1,22.06 | v26.64,18.66 28.33,20.35 v30.43,20.35
  Bottom 0.44: v62.2,17.9 61.5,17.2 v59.4,17.2
  Bottom 0.508: v48.27,19.84 48.01,20.09 C2.1
  other vias: 42.5,20.1
VM  (via drill 0.3)
  Top 0.152: v17.64,4.01 17.5,4 U$8.+ v18.7,4 | v7.3,9.7 7.5,9.5 7.53,9.53 | U$37.1 7,10 v6.8,10.2 | v7.8,9.2 8,9 8.03,9.03 | U$3.5 8.5,9 8.3,8.75
  Top 0.45: 27.28,10.18 27.28,9.28
  Top 0.5: C4.1 55.88,11.42 55.88,9.91 U$4.5
  Top 0.508: Q1.S 26.15,4.51 26.02,4.38 26.02,5.75 U$6.C 26.8,5.52 | 26.8,5.52 27.02,5.3 27.02,4.73 | Q1.S 26.52,4.6 26.52,5.24 26.8,5.52 | Q1.S 27.21,4.51 27.21,5.18
  Top 0.61: 27.66,6.67 27.28,7.04 27.28,9.28 | 27.28,10.18 27.28,14.23 U$9.+ 30.25,17.2 U$2.3
  Top 0.7: U$37.1 7.53,9.53 8.03,9.03 8.3,8.75 v8.3,8.7
  Top 1.05: U$7.+ 56.9,8.2 U$4.5
  Top 1.2: U$7.+ 52.7,4.32
  Top 2: U$8.+ 19.62,6.03 U$6.C 27.02,6.03 27.66,6.67 27.98,6.99 49.71,6.99 U$7.+
  Bottom 1.05: v18.7,4 v16.6,4 13.6,7 10.04,7 6.84,10.2 v6.8,10.2

## Text on the board
tPlace: A5 | VCC | GND | A4 | VCC | GND | A3 | VCC | GND | A2 | VCC | GND | A1 | VCC | GND | IR | D8 | D12 | D7 | USB | D13 | D3 | D11 | ON/OFF | 7-15V | D9 | D10 | - | +
bPlace: Ronin's Robotics | roninsrobotics.com | D3 | D11 | D9 | D10 | + | - | 7-15V